# Altium PCB PCB1.PcbDoc
Units mil, origin at the board's own origin, x right, y up, seen from the top; angles counter-clockwise.
Board outline 1275 x 1135 mil, 2 copper layers (Top Layer, Bottom Layer); 11 components, 14 nets, 53 pads, 4 vias.
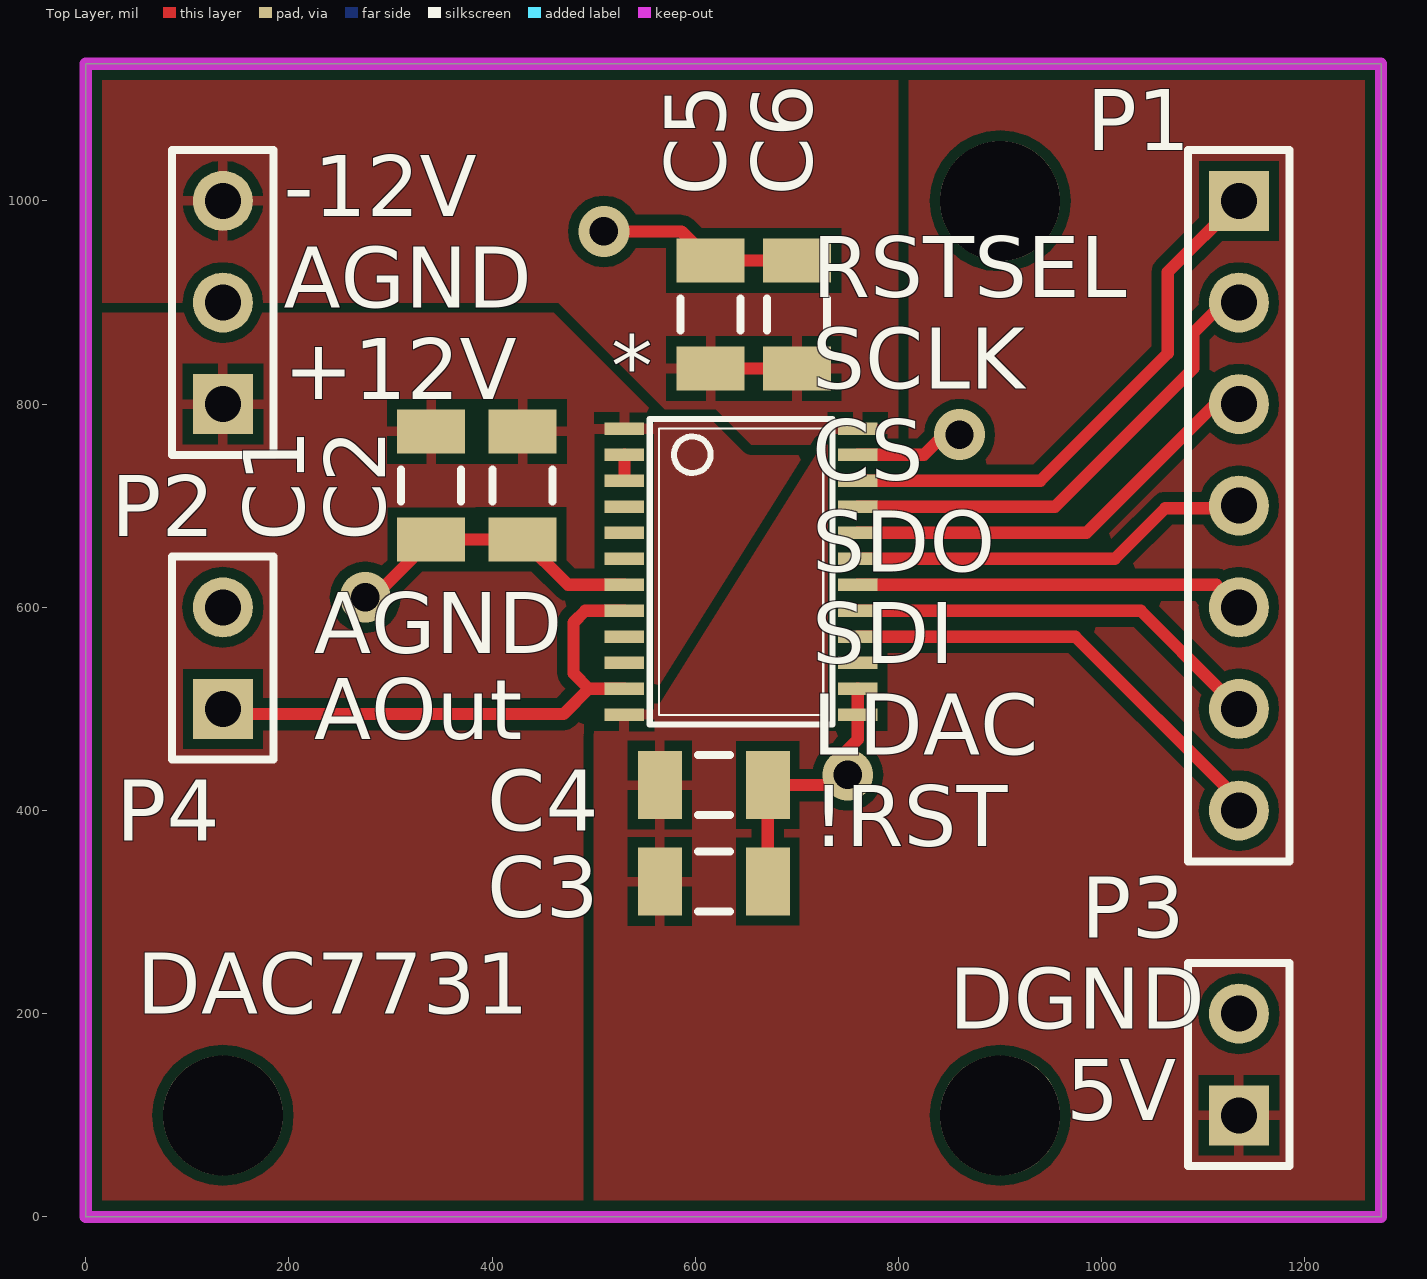
[diagram p0: Top Layer view]
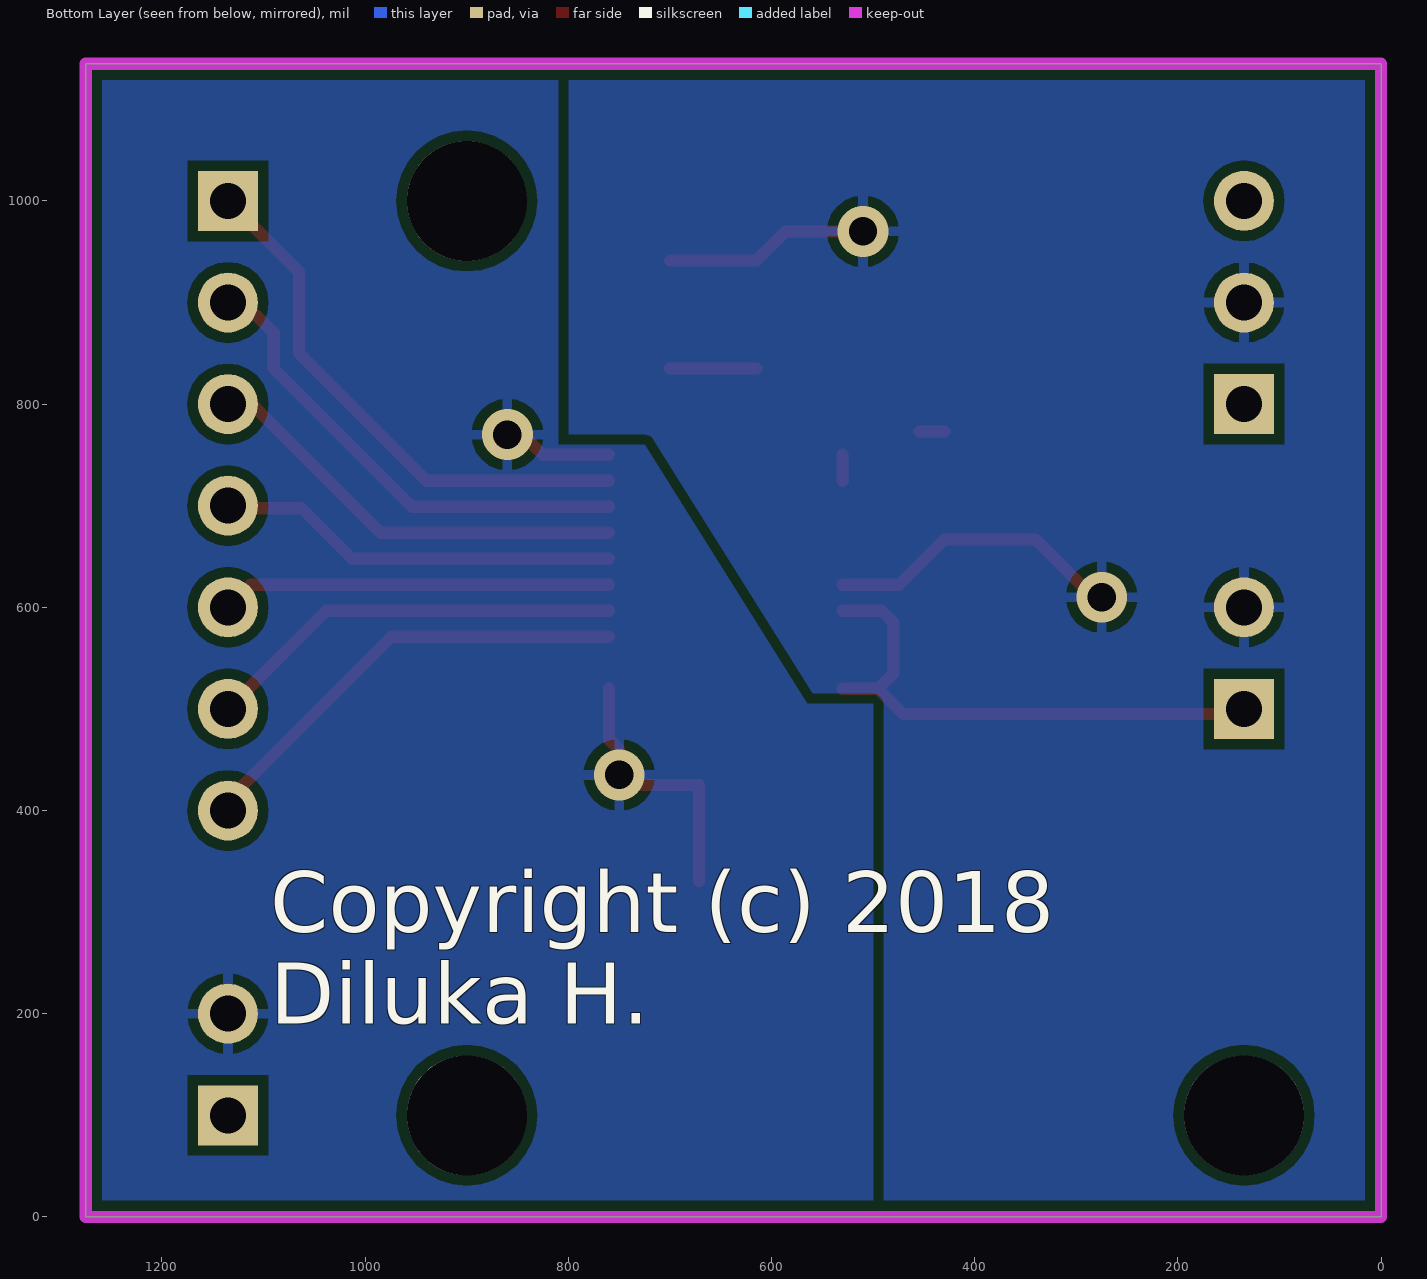
[diagram p1: Bottom Layer view, seen from below]

## Layer stack, top to bottom
Top Solder: solder mask 0.4, Solder Resist, Dk 3.5
Top Layer: signal copper 1.4
Dielectric 1: dielectric 12.6, FR-4, Dk 4.8
Bottom Layer: signal copper 1.4
Bottom Solder: solder mask 0.4, Solder Resist, Dk 3.5

## Board outline
0,0 0,1135 1275,1135 1275,0

## Design rules (kind name [scope] priority, off if disabled: settings)
Clearance [All] p1: gap=10
PolygonConnect [All] p1: connectstyle=Relief reliefconductorwidth=10 reliefentries=4 polygonreliefangle="90 Angle" airgapwidth=10
RoutingVias [All] p1: holewidth=28 width=50 viastyle="Through Hole" minholewidth=28 minwidth=50 maxholewidth=28 maxwidth=50
SolderMaskExpansion [All] p1: expansion=4
Width [All] p1: maxlimit=12 minlimit=10 preferedwidth=10
30 further rules are at their usual default settings.

## Components (designator, comment, footprint, x,y, rotation, side; value= is the part's Value field where it differs from the comment)
* "DAC7731" TSSOP24 645,635 r270 top
C1 "Cap Semi" C1206 340,720 r90 top
C2 "Cap Semi" C1206 430,720 r90 top
C3 "Cap Semi" C1206 618.15,330 r180 top
C4 "Cap Semi" C1206 618.15,425 r180 top
C5 "Cap Semi" C1206 615,888.15 r270 top
C6 "Cap Semi" C1206 700,888.15 r270 top
P1 "Header 7" HDR1X7 1135,1000 r270 top
P2 "Header 3" HDR1X3 135,800 r90 top
P3 "Header 2" HDR1X2 1135,100 r90 top
P4 "Header 2" HDR1X2 135,500 r90 top

## Footprints (in the part's own frame and the unit in brackets; to place one, negate y for a bottom-side part, rotate by r counter-clockwise, add the part's x,y. Pads: shape width x height; smd on the part's side, far side on the other; paste and mask are expansions set on the pad)
C1206 [mm] "Chip Capacitor, Body 3.2x1.6mm, IPC High Density"
  rect 1.1x1.7 smd: 1(-1.35,0) 2(1.35,0)
  silkscreen extent -0.4,-0.75 0.4,0.75, body extent -1.7,-0.9 1.7,0.9, height 1.3
HDR1X2 [mm] "Connector; Header; 2 Position"
  rect 1.5x1.5 hole 0.9: 1(0,0)
  round 1.5 hole 0.9: 2(2.54,0)
  silkscreen extent -1.27,-1.27 3.81,1.27
HDR1X3 [mm] "Connector; Header; 3 Position"
  rect 1.5x1.5 hole 0.9: 1(0,0)
  round 1.5 hole 0.9: 2(2.54,0) 3(5.08,0)
  silkscreen extent -1.27,-1.27 6.35,1.27
HDR1X7 [mm] "Connector; Header; 7 Position"
  rect 1.5x1.5 hole 0.9: 1(0,0)
  round 1.5 hole 0.9: 2(2.54,0) 3(5.08,0) 4(7.62,0) 5(10.16,0) 6(12.7,0) 7(15.24,0)
  silkscreen extent -1.27,-1.27 16.51,1.27
TSSOP24 [mil]
  rect 12x39 smd: 1(-140.75,-114.87) 2(-115.16,-114.87) 3(-89.57,-114.87) 4(-63.98,-114.87) 5(-38.39,-114.87) 6(-12.8,-114.87) 7(12.8,-114.87) 8(38.39,-114.87) 9(63.98,-114.87) 10(89.57,-114.87) 11(115.16,-114.87) 12(140.75,-114.87) 13(140.75,114.87) 14(115.16,114.87) 15(89.57,114.87) 16(63.98,114.87) 17(38.39,114.87) 18(12.8,114.87) 19(-12.8,114.87) 20(-38.39,114.87) 21(-63.98,114.87) 22(-89.57,114.87) 23(-115.16,114.87) 24(-140.75,114.87)
  silkscreen extent -150,-90 150,90

## Part data
C1 C2 C3 C4 C5 C6: "Capacitor (Semiconductor SIM Model)"
P1: "Header, 7-Pin"
P2: "Header, 3-Pin"
P3 P4: "Header, 2-Pin"

## Free pads (board coordinates)
  round 118.11 hole 118.11 unplated: 0(135,100) 1(900,1000) 2(900,100)

## Via types
v1: diameter 50, hole 28, Top Layer to Bottom Layer, 4 vias

## Nets (pads, with @x,y where several pads share a name; then routed paths per layer and width w, separated by ;. In a path a pad name is that pad's centre, name@x,y a point inside that pad or via, vN(x,y) a via of type N, cw(c..) or ccw(c..) an arc to the next point about the centre after c; other vN are vias at no path point)
5V: *.12 C3.2 C4.2 P3.1
+12V: *.1 C1.2 C2.2 P2.1 | length 24.4
  Top Layer w12: C2.2 C2.2@454.38,773.15
-12V: *.24 C5.2 C6.2 P2.3 | length 85
  Top Layer w12: C5.2 C6.2
\C\S\: *.20 P1.3 | length 427.6
  Top Layer w12: *.20 985,673.39 1111.61,800 P1.3
\R\S\T\: *.16 P1.7 | length 451.8
  Top Layer w12: *.16 973.98,571.02 1135,410 P1.7
AGND: *.7 C1.1 C2.1 C5.1 C6.1 P2.2 P4.2 | length 499.1
  Top Layer w12: v1(275,610) 283.15,610 C1.1 C2.1 474.65,622.2 *.7 ; v1(510,970) 586.3,970 C5.1 C6.1
GND: *.13 *.14 *.23 C3.1 C4.1 P3.2 | length 375.1
  Top Layer w12: C3.1 C4.1 740,425 v1(750,435) 750,460 759.87,469.87 *.13 *.14 ; *.23 825.16,750.16 845,770 v1(860,770)
LDAC: *.17 P1.6 | length 408.3
  Top Layer w12: *.17 1038.39,596.61 1118.39,516.61 P1.6@1135,516.61
Net*_2: *.2 *.3 | length 25.3
  Top Layer w12: *.3@529.7,725 *.3 ; *.3@530.13,725.43 *.2
Net*_8: *.8 *.11 P4.1 | length 526.7
  Top Layer w12: P4.1@140.16,494.84 470.16,494.84 495.16,519.84 ; *.11 495.16,519.84 ; *.8 491.61,596.61 480,585 480,535 495.16,519.84
RSTSEL: *.22 P1.1 | length 536.1
  Top Layer w12: *.22 939.57,724.57 1065,850 1065,930 P1.1
SCLK: *.21 P1.2 | length 463.9
  Top Layer w12: *.21 953.98,698.98 1090,835 1090,870 P1.2@1120,900
SDI: *.18 P1.5 | length 352.9
  Top Layer w12: *.18 1112.8,622.2
SDO: *.19 P1.4 | length 393.2
  Top Layer w12: *.19 1012.8,647.8 1062.5,697.5 P1.4@1132.5,697.5
pads on no net: *.4 *.5 *.6 *.9 *.10 *.15

## Polygon pours and split planes (outlines as drawn)
GND on Bottom Layer "DigitalGround" (solid, pour order 0): 1275,0 500,0 500,505 565,505 725,760 810,760 810,1120 1275,1120
AGND on Bottom Layer "AnalogGround" (solid, pour order 2): 0,0 500,0 500,505 565,505 725,760 810,760 810,1120 0,1120
+12V on Top Layer "12Volts" (solid, pour order 8): 15.29,900 465,900 570,795 620,795 655,760 725,760 565,505 490,505 490,15 15,15
-12V on Top Layer "-12Volts" (solid, pour order 6): 15,1120 810,1120 810,973.45 810,825 810,760 655,760 620,795 570,795 465,900 15,900
5V on Top Layer "5Volts" (solid, pour order 4): 500,15 1260,15 1260,1120 810,1120 810,815 810,760 725,760 565,505 500,505

## Keep-outs
Keep-Out Layer:
  the board outline again, w12

## Silkscreen, mask and mechanical layers (free items; w line width, h text height)
Top Overlay:
  text "-12V / AGND / +12V" at 195,805 h60
  text "AGND" at 225,555 h60
  text "AOut" at 225,470 h60
  text "RSTSEL / SCLK / CS / SDO / SDI / LDAC / !RST" at 715,365 h60
  text "DAC7731" at 50,200 h60
  text "DGND" at 850,185 h60
  text "5V" at 965,95 h60
Bottom Overlay:
  text "Copyright (c) 2018 / Diluka H." at 1093.51,190.32 h60